# Altium PCB HBridge.PcbDoc
Units mil, origin at the board's own origin, x right, y up, seen from the top; angles counter-clockwise.
Board outline 5695 x 1405 mil, 2 copper layers (Top Layer, Bottom Layer); 27 components, 15 nets, 105 pads, 15 vias.
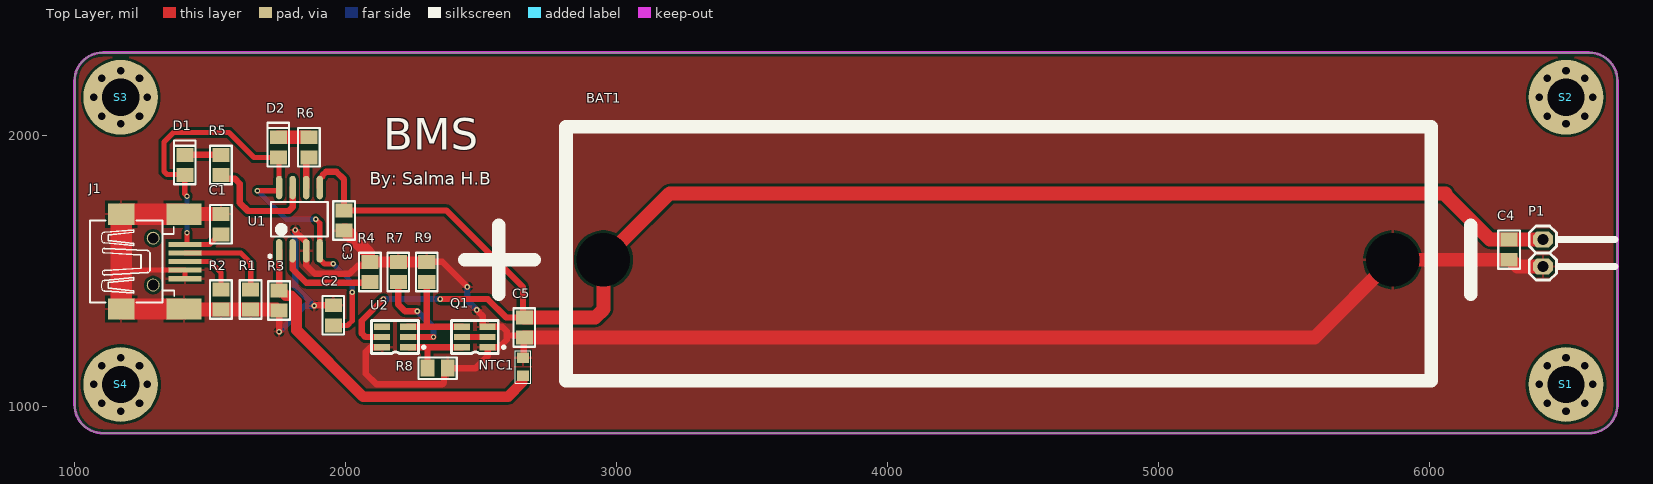
[diagram p0: Top Layer view]
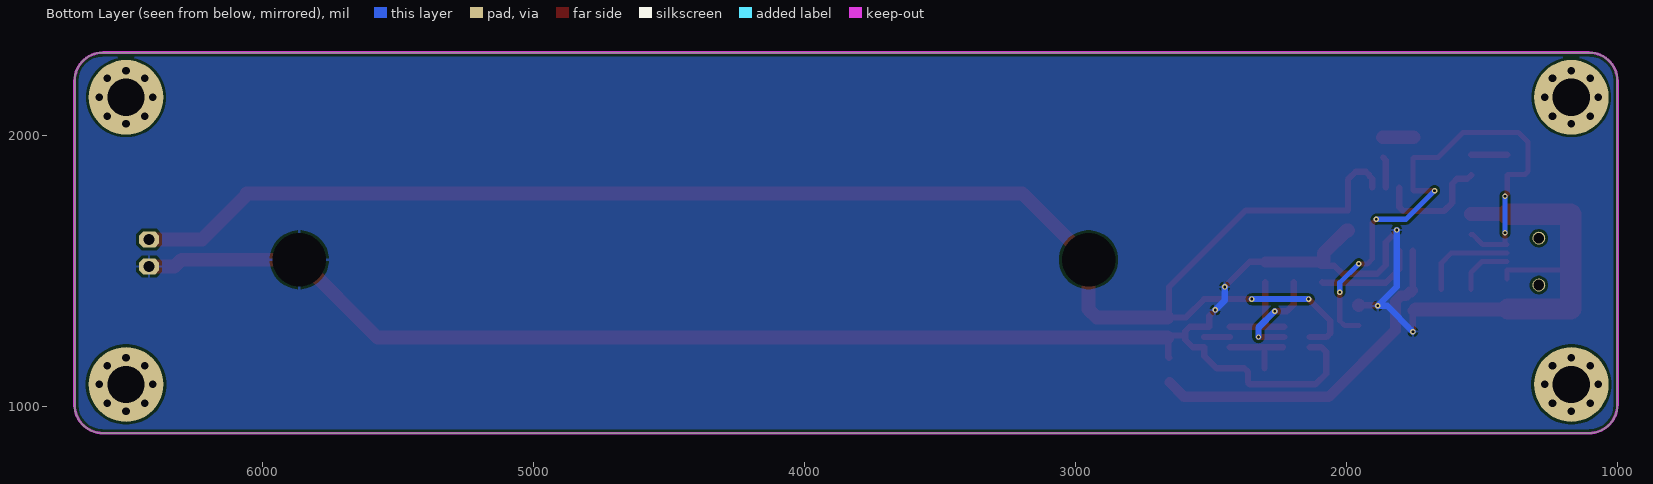
[diagram p1: Bottom Layer view, seen from below]
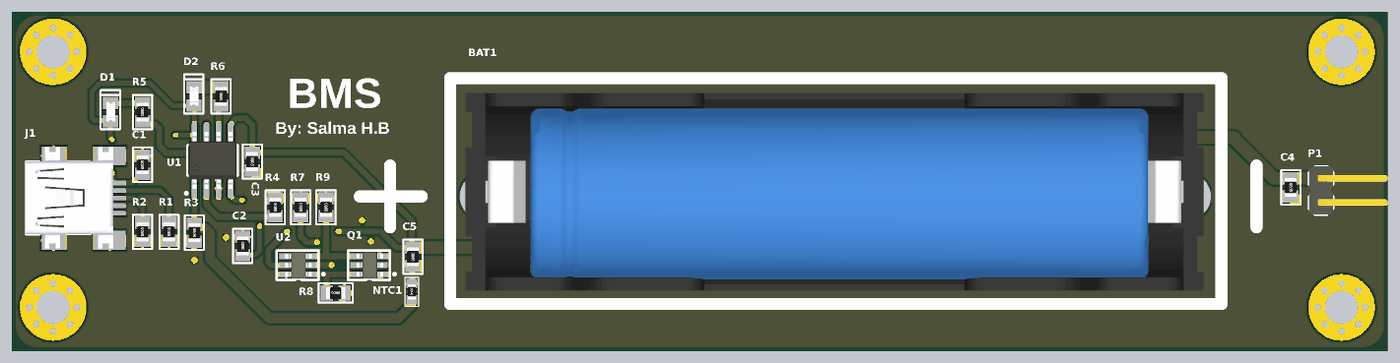
[diagram p2: 3D render of the assembled board from above, using the file's embedded part models]

## Layer stack, top to bottom
Top Solder: solder mask 0.4, Solder Resist, Dk 3.5
Top Layer: signal copper 1.4
Dielectric 1: dielectric 12.6, FR-4, Dk 4.8
Bottom Layer: signal copper 1.4
Bottom Solder: solder mask 0.4, Solder Resist, Dk 3.5

## Board outline
1000,1005 1000,2200 cw(c1105,2200) 1105,2305 6590,2305 cw(c6590,2200) 6695,2200 6695,1005 cw(c6590,1005) 6590,900 1105,900 cw(c1105,1005)

## Design rules (kind name [scope] priority, off if disabled: settings)
Clearance [All] p1: gap=10 ignorepadtopadclearanceinfootprint=FALSE except(0: Arc-Hole Track-Hole SMDPad-Hole THPad-Hole Via-Hole Fill-Hole Poly-Hole Region-Hole Text-Hole)
PolygonConnect [All] p1: connectstyle=Relief reliefconductorwidth=10 reliefentries=4 polygonreliefangle="90 Angle" airgapwidth=10
RoutingVias [All] p1: holewidth=10 width=20 viastyle="Through Hole" minholewidth=10 minwidth=20 maxholewidth=10 maxwidth=20
SolderMaskExpansion [All] p1: expansion=4 istentingtop=FALSE
Width [All] p1: maxlimit=1000 minlimit=10 preferedwidth=10
30 further rules are at their usual default settings.

## Components (designator, comment, footprint, x,y, rotation, side; value= is the part's Value field where it differs from the comment)
BAT1 "LIR18650 Battery" MY_Lith_batt 4480,845 r90 top
C1 "10uF" MY_0805 1540,1671.18 r90 top
C2 "0.1uF" MY_0805 1955,1335 r90 top
C3 "10uF" MY_0805 1995,1685 r270 top
C4 "10uF" MY_0805 6295,1577.73 r270 top
C5 "0.1uF" MY_0805 2660,1290 r270 top
D1 "Red LED" MY_LED_0805 1410,1890 r270 top
D2 "Green LED" MY_LED_0805 1755,1955 r270 top
J1 "Mini_USB" My_USB 1290,1533.39 r0 top
NTC1 "10K" MY_0603 2655,1145 r90 top
P1 "Header 2" MY_MA02-1W 6420,1565.13 r270 top
Q1 "FS8205A MOSFET" MY_SOT23-6 2525,1217.6 r180 top
R1 "15K" MY_0805 1650,1393.39 r90 top
R2 "15K" MY_0805 1540,1393.39 r90 top
R3 "10K" MY_0805 1755,1390 r270 top
R4 "2K" MY_0805 2090,1495 r90 top
R5 "1K" MY_0805 1540,1890 r270 top
R6 "1K" MY_0805 1865,1955 r270 top
R7 "1K" MY_0805 2195,1495 r270 top
R8 "10K" MY_0805 2340,1140 r180 top
R9 "10K" MY_0805 2300,1495 r270 top
S1 "Screw" MY_PAD_3MM 6505,1080 r0 top net-tie
S2 "Screw" MY_PAD_3MM 6505,2140 r0 top net-tie
S3 "Screw" MY_PAD_3MM 1170,2140 r0 top net-tie
S4 "Screw" MY_PAD_3MM 1170,1080 r0 top net-tie
U1 "TP4056" My_SOIC_P8 1830,1690 r90 top
U2 "DW01A" MY_SOT23-6 2230,1217.6 r180 top

## Footprints (in the part's own frame and the unit in brackets; to place one, negate y for a bottom-side part, rotate by r counter-clockwise, add the part's x,y. Pads: shape width x height; smd on the part's side, far side on the other; paste and mask are expansions set on the pad)
MY_0603 [mm]
  rect 1x1.1 smd: 1(-0.85,0) 2(0.85,0)
  silkscreen extent -1.52,-0.71 1.52,0.71, body extent -0.8,-0.4 0.8,0.4, height 0.44
MY_0805 [mm]
  rect 1.3x1.6 smd: 1(-0.95,0) 2(0.95,0)
  silkscreen extent -1.8,-1.02 1.8,1.02, body extent -1,-0.62 1,0.63, height 0.59
MY_LED_0805 [mm]
  rect 1.3x1.6 smd: A(0.95,-0.076) K(-0.95,-0.076)
  silkscreen extent -2.31,-1.09 1.8,0.94, body extent -1.06,-0.48 1.01,0.42, height 0.86
MY_Lith_batt [mil] "LIR18650"
  round 60 hole 196.85: 1(695.33,1528) 2(695.33,-1385.39)
  silkscreen extent 249,-1673 1186,2040, body extent 305,-1454 1123,1603, height 852
MY_MA02-1W [mil]
  oct 60x75 hole 39.37: 1(-50,0) 2(50,0)
  silkscreen extent -100,-50 100,265, body extent -100,-50 100,276, height 170
MY_PAD_3MM [mil]
  round 50 hole 28: 0(-98.43,0) 0(-69.6,-69.6) 0(-69.6,69.6) 0(0,-98.43) 0(0,98.43) 0(69.6,-69.6) 0(69.6,69.6) 0(98.43,0)
  round 275.59 hole 137.8: 0(0,0)
My_SOIC_P8 [mm]
  oval 2.2x0.6 smd: 1(-2.965,1.905) 2(-2.965,0.635) 3(-2.965,-0.635) 4(-2.965,-1.905) 5(2.965,-1.905) 6(2.965,-0.635) 7(2.965,0.635) 8(2.965,1.905)
  silkscreen extent -3.6,-2.65 1.63,2.88, body extent -3.01,-2.5 3.01,2.5, height 1.75
MY_SOT23-6 [mm]
  rect 1.5x0.6 smd: 1(0,0) 2(0,-0.95) 3(0,-1.9) 4(2.4,-1.9) 5(2.4,-0.95) 6(2.4,0)
  silkscreen extent -1.63,-2.5 3.4,0.6, body extent -0.28,-2.36 2.52,0.49, height 1.35
My_USB [mm]
  rect 3.1x0.487 smd: 1(3,1.6) 2(3,0.8) 3(3,0) 4(3,-0.8) 5(3,-1.6)
  rect 2.5x2 smd: 5(-3,-4.45) 5(-3,4.45)
  rect 3.3x2 smd: 5(2.9,-4.45) 5(2.9,4.45)
  round 1.2 hole 1 unplated: ""(0,-2.2) ""(0,2.2)
  silkscreen extent -5.92,-3.85 1.98,3.86, body extent -5.92,-5.32 3.28,5.38, height 3.97

## Part data
BAT1: "Lithium-ion Battery"
C1 C2 C3 C4 C5: library part "Cap ceramic", "None polar capacitor", ASiD Part Number=C-AS, Volte=50v
D1 D2: library part LED, "Typical INFRARED GaAs LED", ASiD Part Number=LED-AS
J1: "USB 2.0, Right Angle, SMT, B Type, Receptacle, 5 Position, Black", ASiD Part Number=Mini_USB-AS
NTC1: library part "NTC thermistor"
P1: "Header, 2-Pin", ASiD Part Number="Header 2-AS"
Q1: "N-Channel Enhancement Mode MOSFET"
R1 R2 R3 R4 R5 R6 R7 R8 R9: library part Res, "Standard resistor", ASiD Part Number=Res-AS
S1 S2 S3 S4: "3mm Screw", ASiD Part Number=Screw-AS
U1: "complete constant-current/constant-voltage linear charger for single cell / lithium-ion batteries. Its SOP package and low external component count make the TP4056 / ideally suited for portable applications. Furthermore, the TP4056 can work within USB and wall / adapter."

## Via types
v1: diameter 20, hole 10, Top Layer to Bottom Layer, 15 vias

## Nets (pads, with @x,y where several pads share a name; then routed paths per layer and width w, separated by ;. In a path a pad name is that pad's centre, name@x,y a point inside that pad or via, vN(x,y) a via of type N, cw(c..) or ccw(c..) an arc to the next point about the centre after c; other vN are vias at no path point)
5V: C1.1 C2.1 D1.A D2.A J1.1 U1.4 U1.8 | length 2061.8
  Top Layer w19.18: J1.1 J1.1@1415,1596.39 ; v1(1415,1640) J1.1@1415,1596.39 ; v1(1415,1775) 1415,1775.22 1407,1783.22 D1.A 1404.6,1855 1341.24,1855 1330,1866.24 1330,1975 1365,2010 1570,2010 1662.4,1917.6 D2.A 1755,1914.6 U1.8 1755,1797.05 1752.95,1795 v1(1675,1795) ; C1.1 1534.09,1633.78 1518.1,1617.78 1518.1,1616.57 1497.91,1596.39 J1.1@1415,1596.39 ; v1(1890,1690) 1890,1689.78 1905,1674.78 U1.4 1905,1542.97 1922.97,1525 v1(1955,1525) ; C2.1 2007.6,1297.6 2025,1315 v1(2025,1420)
  Bottom Layer w19.18: v1(1415,1640) v1(1415,1775) ; v1(1675,1795) 1780,1690 v1(1890,1690) ; v1(1955,1525) 2024.84,1455.16 2024.84,1420.16 v1(2025,1420)
BAT+: BAT1.1 C3.1 C4.1 C5.1 P1.1 U1.5 U2.5 | length 6070.9
  Top Layer w23: U1.5 1905,1838.4 1915,1848.4 1915,1851.53 1928.47,1865 1966.53,1865 1995,1836.53 C3.1 2372.6,1722.4 2655,1440 2655,1332.4 C5.1 2592.6,1327.4 2525,1395 v1(2350,1395) ; U2.5 2073.47,1255 2060,1268.47 2060,1315 v1(2140,1395)
  Top Layer w51.18: C5.1 2922.02,1327.4 2952,1357.38 BAT1.1 3196.69,1785.02 6060,1785.02 6060,1780 6224.87,1615.13 C4.1 P1.1
  Bottom Layer w23: v1(2140,1395) v1(2350,1395)
BAT-: BAT1.2 C1.2 C2.2 C3.2 C4.2 C5.2 J1.4 J1.5 NTC1.2 P1.2 Q1.1 Q1.3 R1.1 R2.1 R3.2 R4.2 R7.1 R8.1 R9.1 U1.3 U2.6 | length 8299.3
  Top Layer w19.18: 1171.89,1508.39 1178.38,1501.9 J1.4 J1.5@1408.11,1470.4
  Top Layer w23.62: v1(1755,1275) R3.2 ; v1(1815,1650) 1815,1644.76 1855,1604.76 U1.3 1855,1520 1886.38,1488.62 2015,1488.62 2045,1518.62 2076.22,1518.62 R4.2 ; v1(1885,1370) 1887.4,1372.4 C2.2 ; U2.6 2092.6,1217.6 2075,1200 2075,1120 2115,1080 2356.16,1080 2363.62,1087.46 2363.62,1126.22 R8.1 2480,1140 2525,1185 Q1.1 2567.6,1217.6 2595,1245 2595,1260.58 ; R9.1 2357.6,1532.4 v1(2450,1440) ; v1(2485,1355) 2507.28,1332.72 2507.28,1292.4 Q1.3 2578.76,1292.4 2595,1276.16 2595,1260.58 ; NTC1.2 2657.5,1180.96 2657.5,1250.1 C5.2 2652.02,1260.58 2595,1260.58
  Top Layer w39.37: R3.2@1745.71,1355.98 1749.09,1352.6 R3.2
  Top Layer w40: R4.2 R7.1 R9.1
  Top Layer w51.18: J1.5@1404.17,1358.2 1406.38,1355.98 R2.1 R1.1 R3.2@1745.71,1355.98 ; J1.5@1404.17,1708.59 C1.2 ; C3.2 2000.91,1647.6 2084.09,1564.41 2084.09,1532.4 R4.2 ; C5.2 5577.66,1252.6 BAT1.2 C4.2 6300.91,1540.33 6326.1,1515.13 P1.2
  Top Layer w78.74: J1.5@1404.17,1358.2 1171.89,1358.2 1171.89,1508.39 1171.89,1708.59 J1.5@1404.17,1708.59
  Bottom Layer w23.62: v1(1755,1275) 1850,1370 v1(1885,1370) 1815,1440 v1(1815,1650) ; v1(2450,1440) 2450,1390 v1(2485,1355)
CHRG: R5.2 U1.7 | length 439.6
  Top Layer w23.62: R5.2 1553.78,1838.82 1592.34,1838.82 1610,1821.16 1610,1750 1640,1720 1790,1720 1805,1735 U1.7
D1/D2: Q1.2 Q1.5 | length 94.5
  Top Layer w23.62: Q1.5 Q1.2
G1: Q1.6 R8.2 U2.1 | length 274.6
  Top Layer w23.62: U2.1@2234.49,1217.6 2305,1217.6 ; R8.2 2302.6,1215.2 2305,1217.6 ; Q1.6 2305,1217.6
G2: Q1.4 R9.2 U2.3 | length 367.8
  Top Layer w23.62: U2.3 2295,1292.4 ; R9.2 2300,1297.4 2295,1292.4 ; Q1.4 2295,1292.4
NetD1_K: D1.K R5.1 | length 133
  Top Layer w23.62: D1.K R5.1
NetD2_K: D2.K R6.1 | length 113
  Top Layer w51.18: D2.K R6.1
NetJ1_2: J1.2 R1.2 | length 354.6
  Top Layer w19.18: J1.2 1613.5,1564.89 1650,1528.39 R1.2
NetJ1_3: J1.3 R2.2 | length 211.1
  Top Layer w19.18: J1.3 1500,1533.39 1540,1493.39 R2.2
NetR7_2: R7.2 U2.2 | length 377.8
  Top Layer w23.62: R7.2 2195,1375 2220,1350 v1(2265,1350) ; U2.2 v1(2325,1255)
  Bottom Layer w23.62: v1(2265,1350) 2325,1290 v1(2325,1255)
NTC: NTC1.1 R3.1 U1.1 | length 1290.9
  Top Layer w23.62: R3.1 U1.1
  Top Layer w39.37: R3.1 1760.91,1421.5 1766.81,1421.5 1780.43,1407.87 1798.79,1407.87 1819.4,1387.27 1819.4,1280.6 2065,1035 2599.97,1035 2653.03,1088.06
PROG: R4.1 U1.2 | length 375.1
  Top Layer w23.62: U1.2 1805,1505 1855,1455 2087.4,1455 R4.1
STDBY: R6.2 U1.6 | length 115
  Top Layer w23: U1.6 1855.12,1806.85 1855.12,1907.72 R6.2
pads on no net: J1. S1.0 S2.0 S3.0 S4.0 U2.4

## Polygon pours and split planes (outlines as drawn)
BAT- on Top Layer "BAT-_L01_P000" (solid, remove dead copper, pour order 0): 1000,1005 1000,2200 cw(c1105,2200) 1105,2305 6590,2305 cw(c6590,2200) 6695,2200 6695,1005 cw(c6590,1005) 6590,900 1105,900 cw(c1105,1005)
BAT- on Bottom Layer "BAT-_L02_P001" (solid, remove dead copper, pour order 1): 1000,1005 1000,2200 cw(c1105,2200) 1105,2305 6590,2305 cw(c6590,2200) 6695,2200 6695,1005 cw(c6590,1005) 6590,900 1105,900 cw(c1105,1005)

## Keep-outs
Keep-Out Layer:
  lines w10: 6695,1000 6695,2200 ccw(c6590,2200) 6590,2305 1105,2305 ccw(c1105,2200) 1000,2200 1000,1005 ccw(c1105,1005) 1105,900 6590,900 ccw(c6590,1005) 6695,1005

## Silkscreen, mask and mechanical layers (free items; w line width, h text height)
Top Overlay:
  text "BMS" at 2140,1907.34 h200
  text "By: Salma H.B" at 2090,1799.9 h78.74